# EAGLE board BaoFengTRRSAdapter (EAGLE 9.6.2)
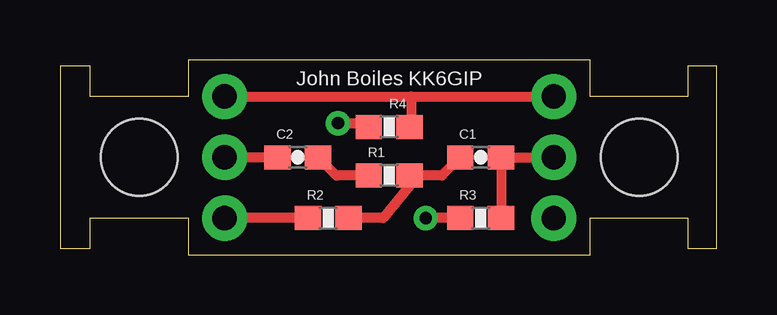
[diagram p0: board, top side]
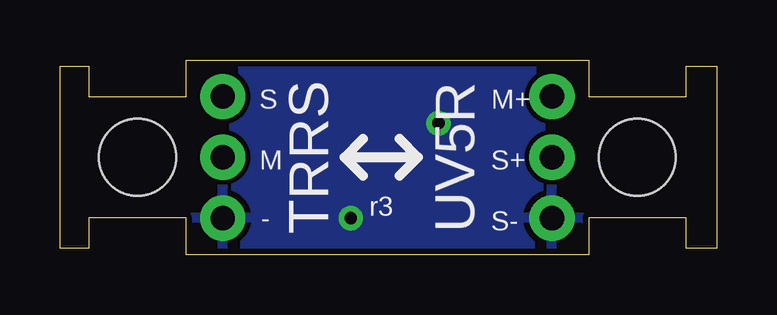
[diagram p1: board, bottom side, seen from below]

Size 27.36 x 8.13 mm. Coordinates in mm from the lower left corner, seen from the top.
Outline: 0,0.25 1.27,0.25 1.27,1.52 5.33,1.52 5.33,0 22.1,0 22.1,1.52 26.16,1.52 26.16,0.25 27.36,0.25 27.36,7.86 26.16,7.87 26.16,6.6 22.1,6.6 22.1,8.13 5.33,8.13 5.33,6.6 1.27,6.6 1.27,7.86 0,7.86 0,0.25
Copper layers (1*16): Top 0.035mm / dielectric 1.5mm / Bottom 0.035mm
Design rules "SparkFun": minimum track width 8mil, minimum drill 20mil, track to track 8mil, track to pad 8mil, pad to pad 8mil, via to via 8mil, smd to smd 8mil, copper to edge 10mil, drill to drill 8mil, minimum pad ring 12mil, minimum via ring 10mil, stop-mask expansion 4mil, vias tented up to drill 25mil, thermal gap 10mil
Holes 3.2 mm at 3.3,4.06 24.13,4.06

## Footprints (pad centres in the part's own frame; a part is rotated, then mirrored left to right if it is on the bottom)
0603-CAP = smd 1.1 x 1: 1 -0.85,0; 2 0.85,0
1X03_NO_SILK = drill 1.016 pad 1.88: 1 0,0; 2 2.54,0; 3 5.08,0
0603-RES = smd 1.1 x 1: 1 -0.85,0; 2 0.85,0

## Placement (x,y rotation side)
C1  .01uF  [0603-CAP]  17.53,4.06 0 top
C2  .01uF  [0603-CAP]  9.91,4.06 180 top
JP1  [1X03_NO_SILK]  6.86,1.52 90 top
JP3  [1X03_NO_SILK]  20.57,1.52 90 top
R1  10k  [0603-RES]  13.72,3.3 0 top
R2  2.2k  [0603-RES]  11.18,1.52 0 top
R3  2.2k  [0603-RES]  17.53,1.52 0 top
R4  0.1k  [0603-RES]  13.72,5.33 0 top

## Library data of the parts
C1 C2 R1 R2 = SparkFun-Passives
JP1 JP3 = SparkFun-Connectors
R3 R4 = SparkFun-Passives; SPICEPREFIX: R

## Nets
BAOFENGMIC+: JP1.3 JP3.3 R4.2
GND: JP1.1 JP3.1 R2.1 R3.1 R4.1
N$1: C2.2 JP1.2
N$3: C1.1 R1.2 R2.2
N$4: C1.2 JP3.2 R3.2
N$6: C2.1 R1.1

## Tracks (layer width: path | path; a pad name or v marks a point on that pad's centre or on a via)
BAOFENGMIC+
  Top 0.203: 14.63,5.49 R4.2
  Top 0.406: JP1.3 14.63,6.6 | 14.63,6.6 JP3.3 | 14.63,6.6 14.63,5.49
GND  (via drill 0.51)
  Top 0.203: 12.8,5.49 R4.1
  Top 0.406: R3.1 v15.24,1.52 | R2.1 JP1.1 | v11.58,5.49 12.8,5.49
  pour Bottom: 0,7.87 0,0.25 1.27,0.25 1.27,1.52 5.33,1.52 5.33,0 22.1,0 22.1,1.52 26.16,1.52 26.16,0.25 27.43,0.25 27.43,7.87 26.16,7.87 26.16,6.6 22.1,6.6 22.1,8.13 5.33,8.13 5.33,6.6 1.27,6.6 1.27,7.87
N$1
  Top 0.406: C2.2 JP1.2
N$3
  Top 0.406: C1.1 15.91,3.3 R1.2 14.57,2.88 13.46,1.52 R2.2
N$4
  Top 0.406: R3.2 C1.2 JP3.2
N$6
  Top 0.406: C2.1 11.52,3.3 R1.1

## Text on the board
tNames: John Boiles KK6GIP
bNames: M+ | S | S+ | UV5R | TRRS | M | r3 | - | S-